# EAGLE board LCD_TFT_Breakout_1in8_128x160-Panel (EAGLE 9.0.1), part 1 of 2
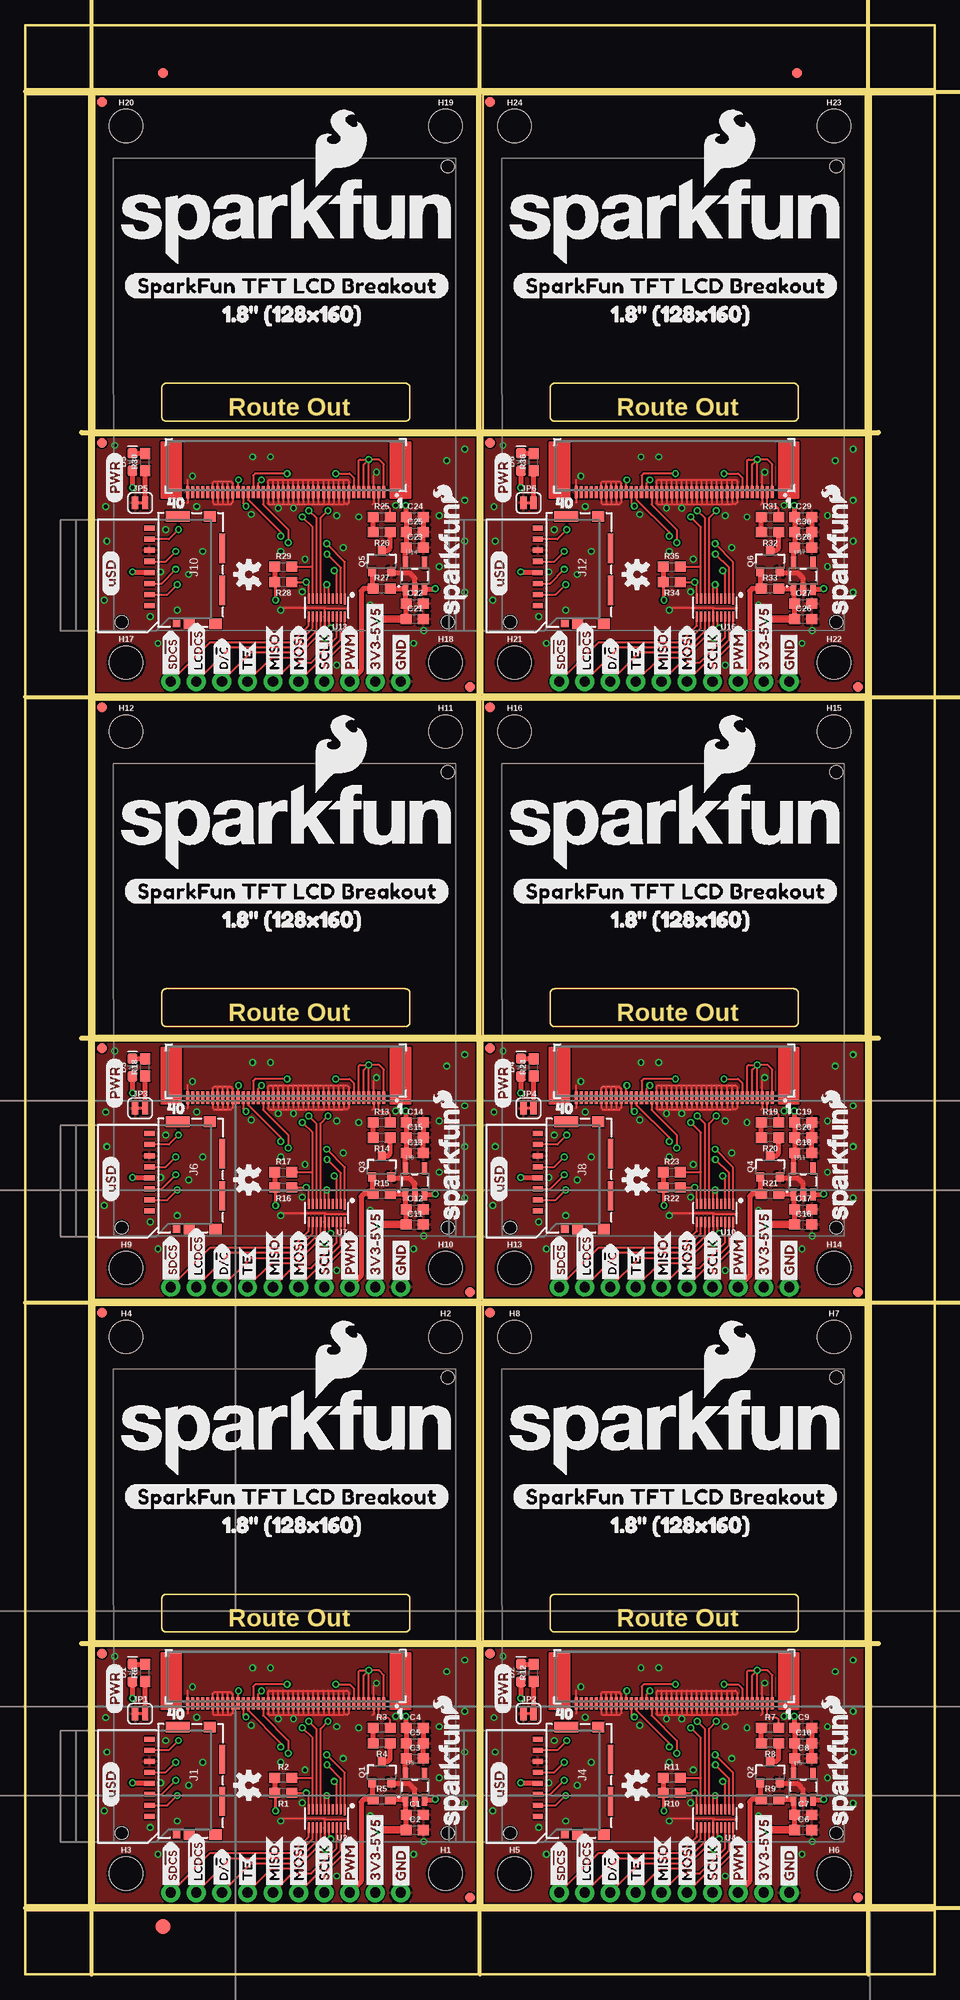
[diagram p0: board, top side]
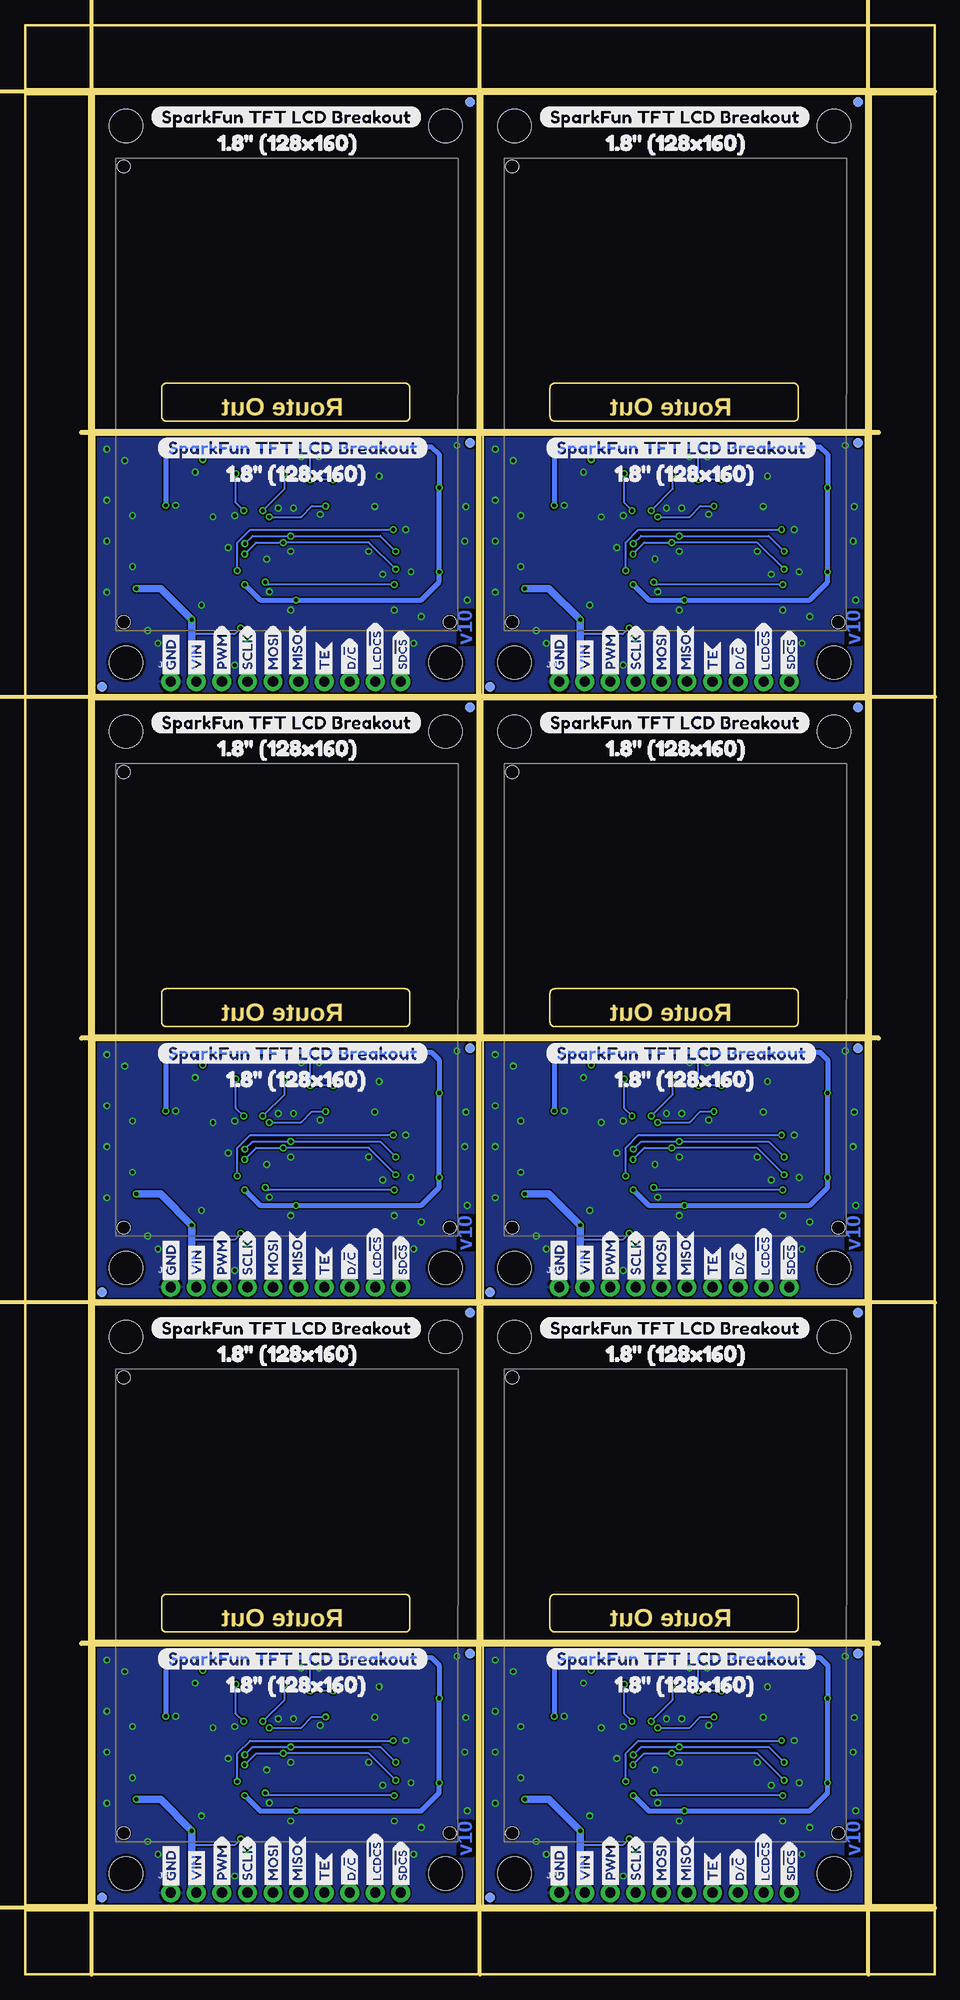
[diagram p1: board, bottom side, seen from below]

Size 90.42 x 193.8 mm. Coordinates in mm from the lower left corner, seen from the top.
Outline: 44.96,6.86 6.86,6.86 6.86,32.64 44.96,32.64 44.96,6.86
Outline: 6.86,66.55 44.96,66.55 44.96,33.15 6.86,33.15 6.86,66.55
Outline: 37.79,37.8 arc-90 38.25,37.34 38.25,34.51 arc-90 37.78,34.04 14.01,34.04 arc-90 13.59,34.46 13.59,37.37 arc-90 14.02,37.8 37.79,37.8
Outline: 83.57,6.86 45.47,6.86 45.47,32.64 83.57,32.64 83.57,6.86
Outline: 45.47,66.55 83.57,66.55 83.57,33.15 45.47,33.15 45.47,66.55
Outline: 76.4,37.8 arc-90 76.86,37.34 76.86,34.51 arc-90 76.39,34.04 52.61,34.04 arc-90 52.2,34.46 52.2,37.37 arc-90 52.62,37.8 76.4,37.8
Outline: 44.96,67.06 6.86,67.06 6.86,92.84 44.96,92.84 44.96,67.06
Outline: 6.86,126.75 44.96,126.75 44.96,93.34 6.86,93.34 6.86,126.75
Outline: 37.79,98 arc-90 38.25,97.54 38.25,94.7 arc-90 37.78,94.23 14.01,94.23 arc-90 13.59,94.65 13.59,97.57 arc-90 14.02,98 37.79,98
Outline: 83.57,67.06 45.47,67.06 45.47,92.84 83.57,92.84 83.57,67.06
Outline: 45.47,126.75 83.57,126.75 83.57,93.34 45.47,93.34 45.47,126.75
Outline: 76.4,98 arc-90 76.86,97.54 76.86,94.7 arc-90 76.39,94.23 52.61,94.23 arc-90 52.2,94.65 52.2,97.57 arc-90 52.62,98 76.4,98
Outline: 44.96,127.25 6.86,127.25 6.86,153.03 44.96,153.03 44.96,127.25
Outline: 6.86,186.94 44.96,186.94 44.96,153.54 6.86,153.54 6.86,186.94
Outline: 37.79,158.19 arc-90 38.25,157.73 38.25,154.9 arc-90 37.78,154.43 14.01,154.43 arc-90 13.59,154.85 13.59,157.76 arc-90 14.02,158.19 37.79,158.19
Outline: 83.57,127.25 45.47,127.25 45.47,153.03 83.57,153.03 83.57,127.25
Outline: 45.47,186.94 83.57,186.94 83.57,153.54 45.47,153.54 45.47,186.94
Outline: 76.4,158.19 arc-90 76.86,157.73 76.86,154.9 arc-90 76.39,154.43 52.61,154.43 arc-90 52.2,154.85 52.2,157.76 arc-90 52.62,158.19 76.4,158.19
Outline: 0,6.35 90.42,6.35 90.42,0 0,0 0,6.35
Outline: 84.07,186.94 90.42,186.94 90.42,6.86 84.07,6.86 84.07,186.94
Outline: 0,193.8 90.42,193.8 90.42,187.45 0,187.45 0,193.8
Outline: 0,186.94 6.35,186.94 6.35,6.86 0,6.86 0,186.94
Copper layers (1*16): Top 0.035mm / dielectric 1.5mm / Bottom 0.035mm
Design rules "SparkFun-2-layer-PCBWay-LIMIT": minimum track width 6mil, minimum drill 0.3mm, track to track 6mil, track to pad 6mil, pad to pad 6mil, via to via 6mil, smd to smd 6mil, copper to edge 6mil, drill to drill 6mil, minimum pad ring 6mil, minimum via ring 6mil, stop-mask expansion 4mil, vias tented up to drill 25mil, thermal gap 10mil
Milling: 13 lines

## Footprints (pad centres in the part's own frame; a part is rotated, then mirrored left to right if it is on the bottom)
0603 = smd 1.1 x 1: 1 -0.85,0; 2 0.85,0
LED-0603 = smd 1 x 1: A -0.877,0; C 0.877,0
FIDUCIAL-1X2 = smd 1 x 1: 1 0,0
FIDUCIAL-1.5X3 = smd 1.5 x 1.5: 1 0,0
STAND-OFF = hole 3.302: 0,0
MICROSD_TINY = smd 0.5 x 1: 1 9.2,-0.85; 2 8.1,-0.85; 3 7,-0.85; 4 5.9,-0.85; 5 4.8,-0.85; 6 3.7,-0.85; 7 2.6,-0.85; 8 1.5,-0.85 | smd 0.72 x 0.78: 9 11,1.83 | smd 1.05 x 1.08: GND1 11,3.1 | smd 1.05 x 1.2: GND2 11,5.71; GND3 0.325,5.14 | smd 1.05 x 2.39: GND4 0.325,1.955 | smd 2.91 x 0.55: GND5 3.505,6.385; GND6 7.695,6.385
1X10_NO_SILK = drill 1.016 pad 1.88: 1 0,0; 2 2.54,0; 3 5.08,0; 4 7.62,0; 5 10.16,0; 6 12.7,0; 7 15.24,0; 8 17.78,0; 9 20.32,0; 10 22.86,0
SMT-JUMPER_2_NC_TRACE_SILK = smd 0.635 x 1.27: 1 -0.508,0; 2 0.508,0
SOT23-3 = smd 0.8 x 0.9: 1 -0.95,-1; 2 0.95,-1; 3 0,1.1
FPC05040-17204 = smd 0.3 x 1.2: P$1 -9.75,0.6; P$2 -9.25,0.6; P$3 -8.75,0.6; P$4 -8.25,0.6; P$5 -7.75,0.6; P$6 -7.25,0.6; P$7 -6.75,0.6; P$8 -6.25,0.6; P$9 -5.75,0.6; P$10 -5.25,0.6; P$11 -4.75,0.6; P$12 -4.25,0.6; P$13 -3.75,0.6; P$14 -3.25,0.6; P$15 -2.75,0.6; P$16 -2.25,0.6; P$17 -1.75,0.6; P$18 -1.25,0.6; P$19 -0.75,0.6; P$20 -0.25,0.6; P$21 0.25,0.6; P$22 0.75,0.6; P$23 1.25,0.6; P$24 1.75,0.6; P$25 2.25,0.6; P$26 2.75,0.6; P$27 3.25,0.6; P$28 3.75,0.6; P$29 4.25,0.6; P$30 4.75,0.6; P$31 5.25,0.6; P$32 5.75,0.6; P$33 6.25,0.6; P$34 6.75,0.6; P$35 7.25,0.6; P$36 7.75,0.6; P$37 8.25,0.6; P$38 8.75,0.6; P$39 9.25,0.6; P$40 9.75,0.6
UFDFN-20 = smd 0.2 x 1.1: 1 -1.8,-0.85 | smd 0.2 x 1: 2 -1.4,-0.9; 3 -1,-0.9; 4 -0.6,-0.9; 5 -0.2,-0.9; 6 0.2,-0.9; 7 0.6,-0.9; 8 1,-0.9; 9 1.4,-0.9; 10 1.8,-0.9; 11 1.8,0.9; 12 1.4,0.9; 13 1,0.9; 14 0.6,0.9; 15 0.2,0.9; 16 -0.2,0.9; 17 -0.6,0.9; 18 -1,0.9; 19 -1.4,0.9; 20 -1.8,0.9
SOT23-5 = smd 0.55 x 1.2: 1 -0.95,-1.3; 2 0,-1.3; 3 0.95,-1.3; 4 0.95,1.3; 5 -0.95,1.3
KWH018ST14-F01_HOLES = hole 1.27: -33.25,-0.85; -33.25,-46.15; -0.85,-46.15

## Placement (x,y rotation side)
C1  1.0uF  [0603]  38.73,15.88 0 top
C2  0.1uF  [0603]  38.73,14.35 0 top
C3  4.7uF  [0603]  38.73,21.46 0 top
C4  1.0uF  [0603]  38.73,24.51 0 top
C5  0.1uF  [0603]  38.73,22.99 0 top
C6  0.1uF  [0603]  77.34,14.35 0 top
C7  1.0uF  [0603]  77.34,15.88 0 top
C8  4.7uF  [0603]  77.34,21.46 0 top
C9  1.0uF  [0603]  77.34,24.51 0 top
C10  0.1uF  [0603]  77.34,22.99 0 top
C11  0.1uF  [0603]  38.73,74.55 0 top
C12  1.0uF  [0603]  38.73,76.07 0 top
C13  4.7uF  [0603]  38.73,81.66 0 top
C14  1.0uF  [0603]  38.73,84.71 0 top
C15  0.1uF  [0603]  38.73,83.19 0 top
C16  0.1uF  [0603]  77.34,74.55 0 top
C17  1.0uF  [0603]  77.34,76.07 0 top
C18  4.7uF  [0603]  77.34,81.66 0 top
C19  1.0uF  [0603]  77.34,84.71 0 top
C20  0.1uF  [0603]  77.34,83.19 0 top
C21  0.1uF  [0603]  38.73,134.75 0 top
C22  1.0uF  [0603]  38.73,136.27 0 top
C23  4.7uF  [0603]  38.73,141.86 0 top
C24  1.0uF  [0603]  38.73,144.91 0 top
C25  0.1uF  [0603]  38.73,143.38 0 top
C26  0.1uF  [0603]  77.34,134.75 0 top
C27  1.0uF  [0603]  77.34,136.27 0 top
C28  4.7uF  [0603]  77.34,141.86 0 top
C29  1.0uF  [0603]  77.34,144.91 0 top
C30  0.1uF  [0603]  77.34,143.38 0 top
D1  RED  [LED-0603]  10.67,29.97 90 top
D2  RED  [LED-0603]  49.28,29.97 90 top
D3  RED  [LED-0603]  10.67,90.17 90 top
D4  RED  [LED-0603]  49.28,90.17 90 top
D5  RED  [LED-0603]  10.67,150.37 90 top
D6  RED  [LED-0603]  49.28,150.37 90 top
E$1  [FIDUCIAL-1X2]  13.72,189.04 0 top
E$2  [FIDUCIAL-1X2]  76.71,189.04 0 top
E$3  [FIDUCIAL-1.5X3]  13.72,4.76 0 top
FD1  FIDUCIAL1X2  [FIDUCIAL-1X2]  7.62,65.79 0 top
FD2  FIDUCIAL1X2  [FIDUCIAL-1X2]  44.2,7.62 0 top
FD3  FIDUCIAL1X2  [FIDUCIAL-1X2]  7.62,65.79 0 bottom
FD4  FIDUCIAL1X2  [FIDUCIAL-1X2]  44.2,7.62 0 bottom
FD5  FIDUCIAL1X2  [FIDUCIAL-1X2]  7.62,31.88 0 top
FD6  FIDUCIAL1X2  [FIDUCIAL-1X2]  7.62,31.88 0 bottom
FD7  FIDUCIAL1X2  [FIDUCIAL-1X2]  46.23,65.79 0 bottom
FD8  FIDUCIAL1X2  [FIDUCIAL-1X2]  82.8,7.62 0 bottom
FD9  FIDUCIAL1X2  [FIDUCIAL-1X2]  46.23,65.79 0 top
FD10  FIDUCIAL1X2  [FIDUCIAL-1X2]  82.8,7.62 0 top
FD11  FIDUCIAL1X2  [FIDUCIAL-1X2]  46.23,31.88 0 top
FD12  FIDUCIAL1X2  [FIDUCIAL-1X2]  46.23,31.88 0 bottom
FD13  FIDUCIAL1X2  [FIDUCIAL-1X2]  7.62,125.98 0 bottom
FD14  FIDUCIAL1X2  [FIDUCIAL-1X2]  44.2,67.82 0 bottom
FD15  FIDUCIAL1X2  [FIDUCIAL-1X2]  7.62,125.98 0 top
FD16  FIDUCIAL1X2  [FIDUCIAL-1X2]  44.2,67.82 0 top
FD17  FIDUCIAL1X2  [FIDUCIAL-1X2]  7.62,92.08 0 top
FD18  FIDUCIAL1X2  [FIDUCIAL-1X2]  7.62,92.08 0 bottom
FD19  FIDUCIAL1X2  [FIDUCIAL-1X2]  46.23,125.98 0 bottom
FD20  FIDUCIAL1X2  [FIDUCIAL-1X2]  82.8,67.82 0 bottom
FD21  FIDUCIAL1X2  [FIDUCIAL-1X2]  46.23,125.98 0 top
FD22  FIDUCIAL1X2  [FIDUCIAL-1X2]  82.8,67.82 0 top
FD23  FIDUCIAL1X2  [FIDUCIAL-1X2]  46.23,92.08 0 top
FD24  FIDUCIAL1X2  [FIDUCIAL-1X2]  46.23,92.08 0 bottom
FD25  FIDUCIAL1X2  [FIDUCIAL-1X2]  7.62,186.18 0 bottom
FD26  FIDUCIAL1X2  [FIDUCIAL-1X2]  44.2,128.02 0 bottom
FD27  FIDUCIAL1X2  [FIDUCIAL-1X2]  7.62,186.18 0 top
FD28  FIDUCIAL1X2  [FIDUCIAL-1X2]  44.2,128.02 0 top
FD29  FIDUCIAL1X2  [FIDUCIAL-1X2]  7.62,152.27 0 top
FD30  FIDUCIAL1X2  [FIDUCIAL-1X2]  7.62,152.27 0 bottom
FD31  FIDUCIAL1X2  [FIDUCIAL-1X2]  46.23,186.18 0 bottom
FD32  FIDUCIAL1X2  [FIDUCIAL-1X2]  82.8,128.02 0 bottom
FD33  FIDUCIAL1X2  [FIDUCIAL-1X2]  46.23,186.18 0 top
FD34  FIDUCIAL1X2  [FIDUCIAL-1X2]  82.8,128.02 0 top
FD35  FIDUCIAL1X2  [FIDUCIAL-1X2]  46.23,152.27 0 top
FD36  FIDUCIAL1X2  [FIDUCIAL-1X2]  46.23,152.27 0 bottom
FRAME1  FRAME-LETTER  [CREATIVE_COMMONS]  6.86,-16.26 0 top  (outside the outline)
FRAME2  FRAME-LETTER  [CREATIVE_COMMONS]  45.47,-16.26 0 top  (outside the outline)
FRAME3  FRAME-LETTER  [CREATIVE_COMMONS]  6.86,43.94 0 top
FRAME4  FRAME-LETTER  [CREATIVE_COMMONS]  45.47,43.94 0 top
FRAME5  FRAME-LETTER  [CREATIVE_COMMONS]  6.86,104.14 0 top
FRAME6  FRAME-LETTER  [CREATIVE_COMMONS]  45.47,104.14 0 top
H1  STAND-OFF  [STAND-OFF]  41.78,10.03 0 top
H2  STAND-OFF  [STAND-OFF]  41.78,63.37 0 top
H3  STAND-OFF  [STAND-OFF]  10.03,10.03 0 top
H4  STAND-OFF  [STAND-OFF]  10.03,63.37 0 top
H5  STAND-OFF  [STAND-OFF]  48.64,10.03 0 top
H6  STAND-OFF  [STAND-OFF]  80.39,10.03 0 top
H7  STAND-OFF  [STAND-OFF]  80.39,63.37 0 top
H8  STAND-OFF  [STAND-OFF]  48.64,63.37 0 top
H9  STAND-OFF  [STAND-OFF]  10.03,70.23 0 top
H10  STAND-OFF  [STAND-OFF]  41.78,70.23 0 top
H11  STAND-OFF  [STAND-OFF]  41.78,123.57 0 top
H12  STAND-OFF  [STAND-OFF]  10.03,123.57 0 top
H13  STAND-OFF  [STAND-OFF]  48.64,70.23 0 top
H14  STAND-OFF  [STAND-OFF]  80.39,70.23 0 top
H15  STAND-OFF  [STAND-OFF]  80.39,123.57 0 top
H16  STAND-OFF  [STAND-OFF]  48.64,123.57 0 top
H17  STAND-OFF  [STAND-OFF]  10.03,130.43 0 top
H18  STAND-OFF  [STAND-OFF]  41.78,130.43 0 top
H19  STAND-OFF  [STAND-OFF]  41.78,183.77 0 top
H20  STAND-OFF  [STAND-OFF]  10.03,183.77 0 top
H21  STAND-OFF  [STAND-OFF]  48.64,130.43 0 top
H22  STAND-OFF  [STAND-OFF]  80.39,130.43 0 top
H23  STAND-OFF  [STAND-OFF]  80.39,183.77 0 top
H24  STAND-OFF  [STAND-OFF]  48.64,183.77 0 top
J1  MICRO-SD_CARD_SOCKETTINY  [MICROSD_TINY]  13.21,24.89 270 top
J2  [1X10_NO_SILK]  37.34,8.13 0 bottom
J3  [1X10_NO_SILK]  75.95,8.13 0 bottom
J4  MICRO-SD_CARD_SOCKETTINY  [MICROSD_TINY]  51.82,24.89 270 top
J5  [1X10_NO_SILK]  37.34,68.33 0 bottom
J6  MICRO-SD_CARD_SOCKETTINY  [MICROSD_TINY]  13.21,85.09 270 top
J7  [1X10_NO_SILK]  75.95,68.33 0 bottom
J8  MICRO-SD_CARD_SOCKETTINY  [MICROSD_TINY]  51.82,85.09 270 top
J9  [1X10_NO_SILK]  37.34,128.52 0 bottom
J10  MICRO-SD_CARD_SOCKETTINY  [MICROSD_TINY]  13.21,145.29 270 top
J11  [1X10_NO_SILK]  75.95,128.52 0 bottom
J12  MICRO-SD_CARD_SOCKETTINY  [MICROSD_TINY]  51.82,145.29 270 top
JP1  LED  [SMT-JUMPER_2_NC_TRACE_SILK]  11.43,25.91 0 top
JP2  LED  [SMT-JUMPER_2_NC_TRACE_SILK]  50.04,25.91 0 top
JP3  LED  [SMT-JUMPER_2_NC_TRACE_SILK]  11.43,86.11 0 top
JP4  LED  [SMT-JUMPER_2_NC_TRACE_SILK]  50.04,86.11 0 top
JP5  LED  [SMT-JUMPER_2_NC_TRACE_SILK]  11.43,146.3 0 top
JP6  LED  [SMT-JUMPER_2_NC_TRACE_SILK]  50.04,146.3 0 top
LOGO1  SFE_LOGO_NAME_FLAME.3_INCH  [SFE_LOGO_NAME_FLAME_.3]  25.91,53.85 0 top
LOGO2  SPECIAL_INSTRUCTIONS-PRODUCTION  [PRODUCTION_INSTRUCTIONS]  -17.65,-33.53 0 top  (outside the outline)
LOGO3  OSHW-LOGOS  [OSHW-LOGO-S]  22.23,18.8 90 top
LOGO4  SPECIAL_INSTRUCTIONS-PRODUCTION  [PRODUCTION_INSTRUCTIONS]  20.95,-33.53 0 top  (outside the outline)
LOGO5  SFE_LOGO_NAME_FLAME.3_INCH  [SFE_LOGO_NAME_FLAME_.3]  64.52,53.85 0 top
LOGO6  OSHW-LOGOS  [OSHW-LOGO-S]  60.83,18.8 90 top
LOGO7  SPECIAL_INSTRUCTIONS-PRODUCTION  [PRODUCTION_INSTRUCTIONS]  -17.65,26.67 0 top  (outside the outline)
LOGO8  SFE_LOGO_NAME_FLAME.3_INCH  [SFE_LOGO_NAME_FLAME_.3]  25.91,114.05 0 top
LOGO9  OSHW-LOGOS  [OSHW-LOGO-S]  22.23,78.99 90 top
LOGO10  SPECIAL_INSTRUCTIONS-PRODUCTION  [PRODUCTION_INSTRUCTIONS]  20.95,26.67 0 top
LOGO11  SFE_LOGO_NAME_FLAME.3_INCH  [SFE_LOGO_NAME_FLAME_.3]  64.52,114.05 0 top
LOGO12  OSHW-LOGOS  [OSHW-LOGO-S]  60.83,78.99 90 top
LOGO13  SPECIAL_INSTRUCTIONS-PRODUCTION  [PRODUCTION_INSTRUCTIONS]  -17.65,86.87 0 top  (outside the outline)
LOGO14  SFE_LOGO_NAME_FLAME.3_INCH  [SFE_LOGO_NAME_FLAME_.3]  25.91,174.24 0 top
LOGO15  OSHW-LOGOS  [OSHW-LOGO-S]  22.23,139.19 90 top
LOGO16  SPECIAL_INSTRUCTIONS-PRODUCTION  [PRODUCTION_INSTRUCTIONS]  20.95,86.87 0 top
LOGO17  SFE_LOGO_NAME_FLAME.3_INCH  [SFE_LOGO_NAME_FLAME_.3]  64.52,174.24 0 top
LOGO18  OSHW-LOGOS  [OSHW-LOGO-S]  60.83,139.19 90 top
Q1  220mA/50V/3.5Ω  [SOT23-3]  35.43,20.07 0 top
Q2  220mA/50V/3.5Ω  [SOT23-3]  74.04,20.07 0 top
Q3  220mA/50V/3.5Ω  [SOT23-3]  35.43,80.26 0 top
Q4  220mA/50V/3.5Ω  [SOT23-3]  74.04,80.26 0 top
Q5  220mA/50V/3.5Ω  [SOT23-3]  35.43,140.46 0 top
Q6  220mA/50V/3.5Ω  [SOT23-3]  74.04,140.46 0 top
R1  10k  [0603]  25.65,18.03 180 top
R2  10k  [0603]  25.65,19.56 0 top
R3  1  [0603]  35.43,24.51 0 top
R4  1  [0603]  35.43,22.99 180 top
R5  10k  [0603]  35.43,17.4 0 top
R6  1k  [0603]  11.94,29.97 90 top
R7  1  [0603]  74.04,24.51 0 top
R8  1  [0603]  74.04,22.99 180 top
R9  10k  [0603]  74.04,17.4 0 top
R10  10k  [0603]  64.26,18.03 180 top
R11  10k  [0603]  64.26,19.56 0 top
R12  1k  [0603]  50.55,29.97 90 top
R13  1  [0603]  35.43,84.71 0 top
R14  1  [0603]  35.43,83.19 180 top
R15  10k  [0603]  35.43,77.6 0 top
R16  10k  [0603]  25.65,78.23 180 top
R17  10k  [0603]  25.65,79.76 0 top
R18  1k  [0603]  11.94,90.17 90 top
R19  1  [0603]  74.04,84.71 0 top
R20  1  [0603]  74.04,83.19 180 top
R21  10k  [0603]  74.04,77.6 0 top
R22  10k  [0603]  64.26,78.23 180 top
R23  10k  [0603]  64.26,79.76 0 top
R24  1k  [0603]  50.55,90.17 90 top
R25  1  [0603]  35.43,144.91 0 top
R26  1  [0603]  35.43,143.38 180 top
R27  10k  [0603]  35.43,137.8 0 top
R28  10k  [0603]  25.65,138.43 180 top
R29  10k  [0603]  25.65,139.95 0 top
R30  1k  [0603]  11.94,150.37 90 top
R31  1  [0603]  74.04,144.91 0 top
R32  1  [0603]  74.04,143.38 180 top
R33  10k  [0603]  74.04,137.8 0 top
R34  10k  [0603]  64.26,138.43 180 top
R35  10k  [0603]  64.26,139.95 0 top
R36  1k  [0603]  50.55,150.37 90 top
U1  [FPC05040-17204]  25.91,27.56 180 top
U2  TXB0108DQSR  [UFDFN-20]  29.97,15.49 180 top
U3  3.3V  [SOT23-5]  38.73,18.64 0 top
U4  TXB0108DQSR  [UFDFN-20]  68.58,15.49 180 top
U5  3.3V  [SOT23-5]  77.34,18.64 0 top
U6  [FPC05040-17204]  64.52,27.56 180 top
U7  TXB0108DQSR  [UFDFN-20]  29.97,75.69 180 top
U8  3.3V  [SOT23-5]  38.73,78.84 0 top
U9  [FPC05040-17204]  25.91,87.76 180 top
U10  TXB0108DQSR  [UFDFN-20]  68.58,75.69 180 top
U11  3.3V  [SOT23-5]  77.34,78.84 0 top
U12  [FPC05040-17204]  64.52,87.76 180 top
U13  TXB0108DQSR  [UFDFN-20]  29.97,135.89 180 top
U14  3.3V  [SOT23-5]  38.73,139.04 0 top
U15  [FPC05040-17204]  25.91,147.96 180 top
U16  TXB0108DQSR  [UFDFN-20]  68.58,135.89 180 top
U17  3.3V  [SOT23-5]  77.34,139.04 0 top
U18  [FPC05040-17204]  64.52,147.96 180 top
U$1  [3V3#5V50]  34.8,8.38 90 top
U$2  [SFE_LOGO_NAME_.1]  42.54,20.32 90 top
U$3  [SFE_LOGO_FLAME_.1]  41.78,26.8 90 top
U$4  [USD2]  8.51,16.64 90 top
U$5  [LCD#CS1]  17.02,8.25 90 top
U$6  [LCD#CS1]  17.02,8.25 90 bottom
U$7  [D##C7]  19.56,8.25 90 bottom
U$8  [SD#CS0]  14.48,8.25 90 top
U$9  [GND0]  37.34,8.38 90 bottom
U$10  [VIN1]  34.8,8.38 90 bottom
U$11  [MISO3]  24.77,8.38 90 bottom
U$12  [MOSI2]  27.18,8.38 90 bottom
U$13  [SCLK4]  29.72,8.38 90 bottom
U$14  [TE5]  22.1,8.38 90 bottom
U$15  [PWM6]  32.26,8.38 90 bottom
U$16  [SD#CS0]  14.48,8.25 90 bottom
U$17  [10]  36.07,25.91 0 top
U$18  [PWR4]  8.89,25.91 90 top
U$19  [SPARKFUN_TFT_LCD_BREAKOUT1]  9.78,47.5 0 top
U$20  [1#8#_#128X160#1]  18.26,44.7 0 top
U$21  [SPARKFUN_TFT_LCD_BREAKOUT2]  39.37,64.26 0 bottom
U$22  [1#8#_#128X160#0]  34.04,61.72 0 bottom
U$23  [SPARKFUN_TFT_LCD_BREAKOUT2]  38.73,31.37 0 bottom
U$24  [1#8#_#128X160#0]  33.15,28.83 0 bottom
U$25  [D##C7]  19.56,8.25 90 top
U$26  [MISO3]  24.77,8.38 90 top
U$27  [MOSI2]  27.18,8.38 90 top
U$28  [SCLK4]  29.72,8.38 90 top
U$29  [TE5]  22.1,8.38 90 top
U$30  [PWM6]  32.26,8.38 90 top
U$31  [401]  13.21,25.91 0 top
U$32  [GND0]  37.34,8.38 90 top
U$33  EXTERNAL_DISP-KWH018ST14-F01  [KWH018ST14-F01_HOLES]  8.76,60.2 0 bottom
U$34  [SFE_LOGO_NAME_.1]  81.15,20.32 90 top
U$35  [SFE_LOGO_FLAME_.1]  80.39,26.8 90 top
U$36  [D##C7]  58.17,8.25 90 bottom
U$37  [GND0]  75.95,8.38 90 bottom
U$38  [VIN1]  73.41,8.38 90 bottom
U$39  [MISO3]  63.37,8.38 90 bottom
U$40  [MOSI2]  65.79,8.38 90 bottom
U$41  [SCLK4]  68.33,8.38 90 bottom
U$42  [TE5]  60.71,8.38 90 bottom
U$43  [PWM6]  70.87,8.38 90 bottom
U$44  [SPARKFUN_TFT_LCD_BREAKOUT1]  48.39,47.5 0 top
U$45  [1#8#_#128X160#1]  56.87,44.7 0 top
U$46  [SPARKFUN_TFT_LCD_BREAKOUT2]  77.98,64.26 0 bottom
U$47  [1#8#_#128X160#0]  72.64,61.72 0 bottom
U$48  [SPARKFUN_TFT_LCD_BREAKOUT2]  77.34,31.37 0 bottom
U$49  [1#8#_#128X160#0]  71.76,28.83 0 bottom
U$50  [D##C7]  58.17,8.25 90 top
U$51  [MISO3]  63.37,8.38 90 top
U$52  [MOSI2]  65.79,8.38 90 top
U$53  [SCLK4]  68.33,8.38 90 top
U$54  [TE5]  60.71,8.38 90 top
U$55  [PWM6]  70.87,8.38 90 top
U$56  [GND0]  75.95,8.38 90 top
U$57  [LCD#CS1]  55.63,8.25 90 top
U$58  [LCD#CS1]  55.63,8.25 90 bottom
U$59  [SD#CS0]  53.09,8.25 90 top
U$60  [SD#CS0]  53.09,8.25 90 bottom
U$61  [USD2]  47.12,16.64 90 top
U$62  [PWR4]  47.5,25.91 90 top
U$63  EXTERNAL_DISP-KWH018ST14-F01  [KWH018ST14-F01_HOLES]  47.37,60.2 0 bottom
U$64  [3V3#5V50]  73.41,8.38 90 top
U$65  [10]  74.68,25.91 0 top
U$66  [401]  51.82,25.91 0 top
U$67  [SFE_LOGO_NAME_.1]  42.54,80.52 90 top
U$68  [SFE_LOGO_FLAME_.1]  41.78,87 90 top
U$69  [D##C7]  19.56,68.45 90 bottom
U$70  [GND0]  37.34,68.58 90 bottom
U$71  [VIN1]  34.8,68.58 90 bottom
U$72  [MISO3]  24.77,68.58 90 bottom
U$73  [MOSI2]  27.18,68.58 90 bottom
U$74  [SCLK4]  29.72,68.58 90 bottom
U$75  [TE5]  22.1,68.58 90 bottom
U$76  [PWM6]  32.26,68.58 90 bottom
U$77  [SPARKFUN_TFT_LCD_BREAKOUT1]  9.78,107.7 0 top
U$78  [1#8#_#128X160#1]  18.26,104.9 0 top
U$79  [SPARKFUN_TFT_LCD_BREAKOUT2]  39.37,124.46 0 bottom
U$80  [1#8#_#128X160#0]  34.04,121.92 0 bottom
U$81  [SPARKFUN_TFT_LCD_BREAKOUT2]  38.73,91.57 0 bottom
U$82  [1#8#_#128X160#0]  33.15,89.03 0 bottom
U$83  [D##C7]  19.56,68.45 90 top
U$84  [MISO3]  24.77,68.58 90 top
U$85  [MOSI2]  27.18,68.58 90 top
U$86  [SCLK4]  29.72,68.58 90 top
U$87  [TE5]  22.1,68.58 90 top
U$88  [PWM6]  32.26,68.58 90 top
U$89  [GND0]  37.34,68.58 90 top
U$90  [LCD#CS1]  17.02,68.45 90 top
U$91  [LCD#CS1]  17.02,68.45 90 bottom
U$92  [SD#CS0]  14.48,68.45 90 top
U$93  [SD#CS0]  14.48,68.45 90 bottom
U$94  [USD2]  8.51,76.84 90 top
U$95  [PWR4]  8.89,86.11 90 top
U$96  EXTERNAL_DISP-KWH018ST14-F01  [KWH018ST14-F01_HOLES]  8.76,120.4 0 bottom
U$97  [3V3#5V50]  34.8,68.58 90 top
U$98  [10]  36.07,86.11 0 top
U$99  [401]  13.21,86.11 0 top
U$100  [SFE_LOGO_NAME_.1]  81.15,80.52 90 top
U$101  [SFE_LOGO_FLAME_.1]  80.39,87 90 top
U$102  [D##C7]  58.17,68.45 90 bottom
U$103  [GND0]  75.95,68.58 90 bottom
U$104  [VIN1]  73.41,68.58 90 bottom
U$105  [MISO3]  63.37,68.58 90 bottom
U$106  [MOSI2]  65.79,68.58 90 bottom
U$107  [SCLK4]  68.33,68.58 90 bottom
U$108  [TE5]  60.71,68.58 90 bottom
U$109  [PWM6]  70.87,68.58 90 bottom
U$110  [SPARKFUN_TFT_LCD_BREAKOUT1]  48.39,107.7 0 top
U$111  [1#8#_#128X160#1]  56.87,104.9 0 top
U$112  [SPARKFUN_TFT_LCD_BREAKOUT2]  77.98,124.46 0 bottom
U$113  [1#8#_#128X160#0]  72.64,121.92 0 bottom
U$114  [SPARKFUN_TFT_LCD_BREAKOUT2]  77.34,91.57 0 bottom
U$115  [1#8#_#128X160#0]  71.76,89.03 0 bottom
U$116  [D##C7]  58.17,68.45 90 top
U$117  [MISO3]  63.37,68.58 90 top
U$118  [MOSI2]  65.79,68.58 90 top
U$119  [SCLK4]  68.33,68.58 90 top
U$120  [TE5]  60.71,68.58 90 top
U$121  [PWM6]  70.87,68.58 90 top
U$122  [GND0]  75.95,68.58 90 top
U$123  [LCD#CS1]  55.63,68.45 90 top
U$124  [LCD#CS1]  55.63,68.45 90 bottom
U$125  [SD#CS0]  53.09,68.45 90 top
U$126  [SD#CS0]  53.09,68.45 90 bottom
U$127  [USD2]  47.12,76.84 90 top
U$128  [PWR4]  47.5,86.11 90 top
U$129  EXTERNAL_DISP-KWH018ST14-F01  [KWH018ST14-F01_HOLES]  47.37,120.4 0 bottom
U$130  [3V3#5V50]  73.41,68.58 90 top
U$131  [10]  74.68,86.11 0 top
U$132  [401]  51.82,86.11 0 top
U$133  [SFE_LOGO_NAME_.1]  42.54,140.72 90 top
U$134  [SFE_LOGO_FLAME_.1]  41.78,147.19 90 top
U$135  [D##C7]  19.56,128.65 90 bottom
U$136  [GND0]  37.34,128.78 90 bottom
U$137  [VIN1]  34.8,128.78 90 bottom
U$138  [MISO3]  24.77,128.78 90 bottom
U$139  [MOSI2]  27.18,128.78 90 bottom
U$140  [SCLK4]  29.72,128.78 90 bottom
U$141  [TE5]  22.1,128.78 90 bottom
U$142  [PWM6]  32.26,128.78 90 bottom
U$143  [SPARKFUN_TFT_LCD_BREAKOUT1]  9.78,167.89 0 top
U$144  [1#8#_#128X160#1]  18.26,165.1 0 top
U$145  [SPARKFUN_TFT_LCD_BREAKOUT2]  39.37,184.66 0 bottom
U$146  [1#8#_#128X160#0]  34.04,182.12 0 bottom
U$147  [SPARKFUN_TFT_LCD_BREAKOUT2]  38.73,151.77 0 bottom
U$148  [1#8#_#128X160#0]  33.15,149.22 0 bottom
U$149  [D##C7]  19.56,128.65 90 top
U$150  [MISO3]  24.77,128.78 90 top
U$151  [MOSI2]  27.18,128.78 90 top
U$152  [SCLK4]  29.72,128.78 90 top
U$153  [TE5]  22.1,128.78 90 top
U$154  [PWM6]  32.26,128.78 90 top
U$155  [GND0]  37.34,128.78 90 top
U$156  [LCD#CS1]  17.02,128.65 90 top
U$157  [LCD#CS1]  17.02,128.65 90 bottom
U$158  [SD#CS0]  14.48,128.65 90 top
U$159  [SD#CS0]  14.48,128.65 90 bottom
U$160  [USD2]  8.51,137.03 90 top
U$161  [PWR4]  8.89,146.3 90 top
U$162  EXTERNAL_DISP-KWH018ST14-F01  [KWH018ST14-F01_HOLES]  8.76,180.59 0 bottom
U$163  [3V3#5V50]  34.8,128.78 90 top
U$164  [10]  36.07,146.3 0 top
U$165  [401]  13.21,146.3 0 top
U$166  [SFE_LOGO_NAME_.1]  81.15,140.72 90 top
U$167  [SFE_LOGO_FLAME_.1]  80.39,147.19 90 top
U$168  [D##C7]  58.17,128.65 90 bottom
U$169  [GND0]  75.95,128.78 90 bottom
U$170  [VIN1]  73.41,128.78 90 bottom
U$171  [MISO3]  63.37,128.78 90 bottom
U$172  [MOSI2]  65.79,128.78 90 bottom
U$173  [SCLK4]  68.33,128.78 90 bottom
U$174  [TE5]  60.71,128.78 90 bottom
U$175  [PWM6]  70.87,128.78 90 bottom
U$176  [SPARKFUN_TFT_LCD_BREAKOUT1]  48.39,167.89 0 top
U$177  [1#8#_#128X160#1]  56.87,165.1 0 top
U$178  [SPARKFUN_TFT_LCD_BREAKOUT2]  77.98,184.66 0 bottom
U$179  [1#8#_#128X160#0]  72.64,182.12 0 bottom
U$180  [SPARKFUN_TFT_LCD_BREAKOUT2]  77.34,151.77 0 bottom
U$181  [1#8#_#128X160#0]  71.76,149.22 0 bottom
U$182  [D##C7]  58.17,128.65 90 top
U$183  [MISO3]  63.37,128.78 90 top
U$184  [MOSI2]  65.79,128.78 90 top
U$185  [SCLK4]  68.33,128.78 90 top
U$186  [TE5]  60.71,128.78 90 top
U$187  [PWM6]  70.87,128.78 90 top
U$188  [GND0]  75.95,128.78 90 top
U$189  [LCD#CS1]  55.63,128.65 90 top
U$190  [LCD#CS1]  55.63,128.65 90 bottom
U$191  [SD#CS0]  53.09,128.65 90 top
U$192  [SD#CS0]  53.09,128.65 90 bottom
U$193  [USD2]  47.12,137.03 90 top
U$194  [PWR4]  47.5,146.3 90 top
U$195  EXTERNAL_DISP-KWH018ST14-F01  [KWH018ST14-F01_HOLES]  47.37,180.59 0 bottom
U$196  [3V3#5V50]  73.41,128.78 90 top
U$197  [10]  74.68,146.3 0 top
U$198  [401]  51.82,146.3 0 top

## Library data of the parts
C1 C4 C7 C9 C12 C14 C17 C19 C22 C24 C27 C29 = SparkFun-Capacitors; PROD_ID: CAP-00868
C2 C5 C6 C10 C11 C15 C16 C20 C21 C25 C26 C30 = SparkFun-Capacitors; PROD_ID: CAP-08390
C3 C8 C13 C18 C23 C28 = SparkFun-Capacitors; PROD_ID: CAP-08280
D1-D6 = SparkFun-LED; PROD_ID: DIO-00819
E$1 E$2 FD1-FD36 LOGO1-LOGO18 U$2 U$3 U$34 U$35 U$67 U$68 U$100 U$101 U$133 U$134 U$166 U$167 = SparkFun-Aesthetics
E$3 = SparkFun-Retired
FRAME1-FRAME6 = SparkFun-Aesthetics; DESIGNER: Owen Lyke; REV: v10
H1-H24 = SparkFun-Hardware
J1 J4 J6 J8 J10 J12 = SparkFun-Connectors; PROD_ID: CONN-13500
J2 J3 J5 J7 J9 J11 = SparkFun-Connectors; PROD_ID: CONN-11563
JP1-JP6 = SparkFun-Jumpers
Q1-Q6 = SparkFun-DiscreteSemi; PROD_ID: TRANS-00830
R1 R2 R5 R9-R11 R15-R17 R21-R23 R27-R29 R33-R35 = SparkFun-Resistors; PROD_ID: RES-00824
R3 R4 R7 R8 R13 R14 R19 R20 R25 R26 R31 R32 = SparkFun-Resistors; PROD_ID: RES-08269
R6 R12 R18 R24 R30 R36 = SparkFun-Resistors; PROD_ID: RES-07856
U1 U6 U9 U12 U15 U18 = SparkFun-Displays; PROD_ID: CONN-14082; PROD_ID1: LCD-14196
U2 U4 U7 U10 U13 U16 = SparkFun-IC-Comms; PROD_ID: IC-12292
U3 U5 U8 U11 U14 U17 = SparkFun-IC-Power; PROD_ID: VREG-12457
U$1 U$64 U$97 U$130 U$163 U$196 = V3to5
U$4-U$6 U$8 U$16 U$18 U$57-U$62 U$90-U$95 U$123-U$128 U$156-U$161 U$189-U$194 = cs
U$7 U$9-U$15 U$17 U$25-U$32 U$36-U$43 U$50-U$56 U$65 U$66 U$69-U$76 U$83-U$89 U$98 U$99 U$102-U$109 U$116-U$122 U$131 U$132 U$135-U$142 U$149-U$155 U$164 U$165 U$168-U$175 U$182-U$188 U$197 U$198 = buzzard_labels
U$19-U$24 U$44-U$49 U$77-U$82 U$110-U$115 U$143-U$148 U$176-U$181 = title
U$33 U$63 U$96 U$129 U$162 U$195 = SparkFun-Displays; PROD_ID: LCD-14196

## Nets
3.3V: C3.1 C4.1 C5.1 D1.A J1.4 R1.2 R2.1 U1.P$1 U1.P$4 U1.P$5 U1.P$6 U1.P$26 U1.P$30 U2.5 U2.6 U3.5
3.3V1: C8.1 C9.1 C10.1 D2.A J4.4 R10.2 R11.1 U4.5 U4.6 U5.5 U6.P$1 U6.P$4 U6.P$5 U6.P$6 U6.P$26 U6.P$30
3.3V2: C13.1 C14.1 C15.1 D3.A J6.4 R16.2 R17.1 U7.5 U7.6 U8.5 U9.P$1 U9.P$4 U9.P$5 U9.P$6 U9.P$26 U9.P$30
3.3V3: C18.1 C19.1 C20.1 D4.A J8.4 R22.2 R23.1 U10.5 U10.6 U11.5 U12.P$1 U12.P$4 U12.P$5 U12.P$6 U12.P$26 U12.P$30
3.3V4: C23.1 C24.1 C25.1 D5.A J10.4 R28.2 R29.1 U13.5 U13.6 U14.5 U15.P$1 U15.P$4 U15.P$5 U15.P$6 U15.P$26 U15.P$30
3.3V5: C28.1 C29.1 C30.1 D6.A J12.4 R34.2 R35.1 U16.5 U16.6 U17.5 U18.P$1 U18.P$4 U18.P$5 U18.P$6 U18.P$26 U18.P$30
!CS: R2.2 U1.P$29 U2.9
!CS1: R11.2 U4.9 U6.P$29
!CS2: R17.2 U7.9 U9.P$29
!CS3: R23.2 U10.9 U12.P$29
!CS4: R29.2 U13.9 U15.P$29
!CS5: R35.2 U16.9 U18.P$29
!CS!_IN: J2.9 U2.12
!CS!_IN1: J3.9 U4.12
!CS!_IN2: J5.9 U7.12
!CS!_IN3: J7.9 U10.12
!CS!_IN4: J9.9 U13.12
!CS!_IN5: J11.9 U16.12
D/!C: U1.P$27 U2.8
D/!C1: U4.8 U6.P$27
D/!C2: U7.8 U9.P$27
D/!C3: U10.8 U12.P$27
D/!C4: U13.8 U15.P$27
D/!C5: U16.8 U18.P$27
D/!C!_IN: J2.8 U2.13
D/!C!_IN1: J3.8 U4.13
D/!C!_IN2: J5.8 U7.13
D/!C!_IN3: J7.8 U10.13
D/!C!_IN4: J9.8 U13.13
D/!C!_IN5: J11.8 U16.13
GND: C1.2 C2.2 C3.2 C4.2 C5.2 J1.6 J2.1 JP1.1 Q1.2 U1.P$3 U1.P$8 U1.P$9 U1.P$10 U1.P$11 U1.P$12 U1.P$13 U1.P$14 U1.P$15 U1.P$16 U1.P$17 U1.P$18 U1.P$19 U1.P$20 U1.P$21 U1.P$22 U1.P$23 U1.P$24 U1.P$31 U1.P$32 U1.P$33 U1.P$34 U1.P$35 U1.P$40 U2.15 U3.2
GND1: C6.2 C7.2 C8.2 C9.2 C10.2 J3.1 J4.6 JP2.1 Q2.2 U4.15 U5.2 U6.P$3 U6.P$8 U6.P$9 U6.P$10 U6.P$11 U6.P$12 U6.P$13 U6.P$14 U6.P$15 U6.P$16 U6.P$17 U6.P$18 U6.P$19 U6.P$20 U6.P$21 U6.P$22 U6.P$23 U6.P$24 U6.P$31 U6.P$32 U6.P$33 U6.P$34 U6.P$35 U6.P$40
GND2: C11.2 C12.2 C13.2 C14.2 C15.2 J5.1 J6.6 JP3.1 Q3.2 U7.15 U8.2 U9.P$3 U9.P$8 U9.P$9 U9.P$10 U9.P$11 U9.P$12 U9.P$13 U9.P$14 U9.P$15 U9.P$16 U9.P$17 U9.P$18 U9.P$19 U9.P$20 U9.P$21 U9.P$22 U9.P$23 U9.P$24 U9.P$31 U9.P$32 U9.P$33 U9.P$34 U9.P$35 U9.P$40
GND3: C16.2 C17.2 C18.2 C19.2 C20.2 J7.1 J8.6 JP4.1 Q4.2 U10.15 U11.2 U12.P$3 U12.P$8 U12.P$9 U12.P$10 U12.P$11 U12.P$12 U12.P$13 U12.P$14 U12.P$15 U12.P$16 U12.P$17 U12.P$18 U12.P$19 U12.P$20 U12.P$21 U12.P$22 U12.P$23 U12.P$24 U12.P$31 U12.P$32 U12.P$33 U12.P$34 U12.P$35 U12.P$40
GND4: C21.2 C22.2 C23.2 C24.2 C25.2 J9.1 J10.6 JP5.1 Q5.2 U13.15 U14.2 U15.P$3 U15.P$8 U15.P$9 U15.P$10 U15.P$11 U15.P$12 U15.P$13 U15.P$14 U15.P$15 U15.P$16 U15.P$17 U15.P$18 U15.P$19 U15.P$20 U15.P$21 U15.P$22 U15.P$23 U15.P$24 U15.P$31 U15.P$32 U15.P$33 U15.P$34 U15.P$35 U15.P$40
GND5: C26.2 C27.2 C28.2 C29.2 C30.2 J11.1 J12.6 JP6.1 Q6.2 U16.15 U17.2 U18.P$3 U18.P$8 U18.P$9 U18.P$10 U18.P$11 U18.P$12 U18.P$13 U18.P$14 U18.P$15 U18.P$16 U18.P$17 U18.P$18 U18.P$19 U18.P$20 U18.P$21 U18.P$22 U18.P$23 U18.P$24 U18.P$31 U18.P$32 U18.P$33 U18.P$34 U18.P$35 U18.P$40
LED_PWM: J2.3 Q1.1 R5.1
LED_PWM1: J3.3 Q2.1 R9.1
LED_PWM2: J5.3 Q3.1 R15.1
LED_PWM3: J7.3 Q4.1 R21.1
LED_PWM4: J9.3 Q5.1 R27.1
LED_PWM5: J11.3 Q6.1 R33.1
LEDK: R3.2 U1.P$2
LEDK1: R7.2 U6.P$2
LEDK2: R13.2 U9.P$2
LEDK3: R19.2 U12.P$2
LEDK4: R25.2 U15.P$2
LEDK5: R31.2 U18.P$2
MISO: J1.7 U2.3
MISO1: J4.7 U4.3
MISO2: J6.7 U7.3
MISO3: J8.7 U10.3
MISO4: J10.7 U13.3
MISO5: J12.7 U16.3
MISO_IN: J2.6 U2.18
MISO_IN1: J3.6 U4.18
MISO_IN2: J5.6 U7.18
MISO_IN3: J7.6 U10.18
MISO_IN4: J9.6 U13.18
MISO_IN5: J11.6 U16.18
MOSI: J1.3 U1.P$25 U2.2
MOSI1: J4.3 U4.2 U6.P$25
MOSI2: J6.3 U7.2 U9.P$25
MOSI3: J8.3 U10.2 U12.P$25
MOSI4: J10.3 U13.2 U15.P$25
MOSI5: J12.3 U16.2 U18.P$25
MOSI_IN: J2.5 U2.19
MOSI_IN1: J3.5 U4.19
MOSI_IN2: J5.5 U7.19
MOSI_IN3: J7.5 U10.19
MOSI_IN4: J9.5 U13.19
MOSI_IN5: J11.5 U16.19
N$1: D1.C R6.2
N$2: JP1.2 R6.1
N$3: R3.1 R4.2
N$4: Q2.3 R8.1
N$5: Q1.3 R4.1
N$6: D2.C R12.2
N$7: JP2.2 R12.1
N$8: R7.1 R8.2
N$9: Q3.3 R14.1
N$10: D3.C R18.2
N$11: JP3.2 R18.1
N$12: R13.1 R14.2
N$13: Q4.3 R20.1
N$14: D4.C R24.2
N$15: JP4.2 R24.1
N$16: R19.1 R20.2
N$17: Q5.3 R26.1
N$18: D5.C R30.2
N$19: JP5.2 R30.1
N$20: R25.1 R26.2
N$21: Q6.3 R32.1
N$22: D6.C R36.2
N$23: JP6.2 R36.1
N$24: R31.1 R32.2
SCLK: J1.5 U1.P$28 U2.1
SCLK1: J4.5 U4.1 U6.P$28
SCLK2: J6.5 U7.1 U9.P$28
SCLK3: J8.5 U10.1 U12.P$28
SCLK4: J10.5 U13.1 U15.P$28
SCLK5: J12.5 U16.1 U18.P$28
SCLK_IN: J2.4 U2.20
SCLK_IN1: J3.4 U4.20
SCLK_IN2: J5.4 U7.20
SCLK_IN3: J7.4 U10.20
SCLK_IN4: J9.4 U13.20
SCLK_IN5: J11.4 U16.20
SD_!CS: J1.2 R1.1 U2.10
SD_!CS1: J4.2 R10.1 U4.10
SD_!CS2: J6.2 R16.1 U7.10
SD_!CS3: J8.2 R22.1 U10.10
SD_!CS4: J10.2 R28.1 U13.10
SD_!CS5: J12.2 R34.1 U16.10
SD_!CS!_IN: J2.10 U2.11
SD_!CS!_IN1: J3.10 U4.11
SD_!CS!_IN2: J5.10 U7.11
SD_!CS!_IN3: J7.10 U10.11
SD_!CS!_IN4: J9.10 U13.11
SD_!CS!_IN5: J11.10 U16.11
TE: U1.P$7 U2.7
TE1: U4.7 U6.P$7
TE2: U7.7 U9.P$7
TE3: U10.7 U12.P$7
TE4: U13.7 U15.P$7
TE5: U16.7 U18.P$7
TE_IN: J2.7 U2.14
TE_IN1: J3.7 U4.14
TE_IN2: J5.7 U7.14
TE_IN3: J7.7 U10.14
TE_IN4: J9.7 U13.14
TE_IN5: J11.7 U16.14
VIN: C1.1 C2.1 J2.2 R5.2 U2.16 U3.1 U3.3
VIN1: C6.1 C7.1 J3.2 R9.2 U4.16 U5.1 U5.3
VIN2: C11.1 C12.1 J5.2 R15.2 U7.16 U8.1 U8.3
VIN3: C16.1 C17.1 J7.2 R21.2 U10.16 U11.1 U11.3
VIN4: C21.1 C22.1 J9.2 R27.2 U13.16 U14.1 U14.3
VIN5: C26.1 C27.1 J11.2 R33.2 U16.16 U17.1 U17.3